# EAGLE board ToUPM (EAGLE 5.10)
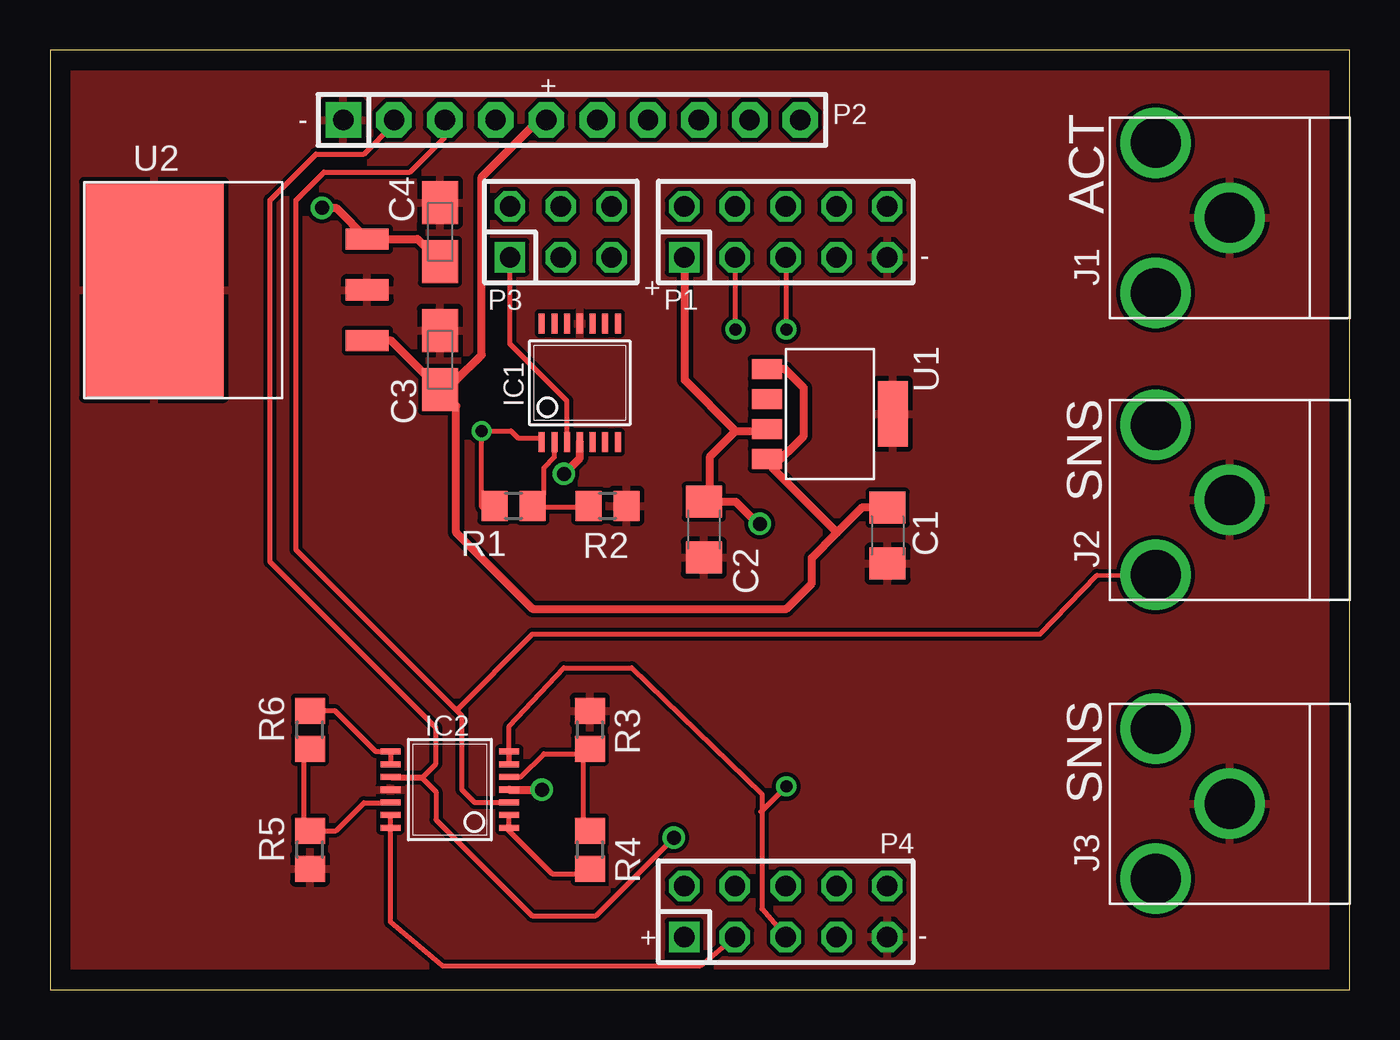
[diagram p0: board, top side]
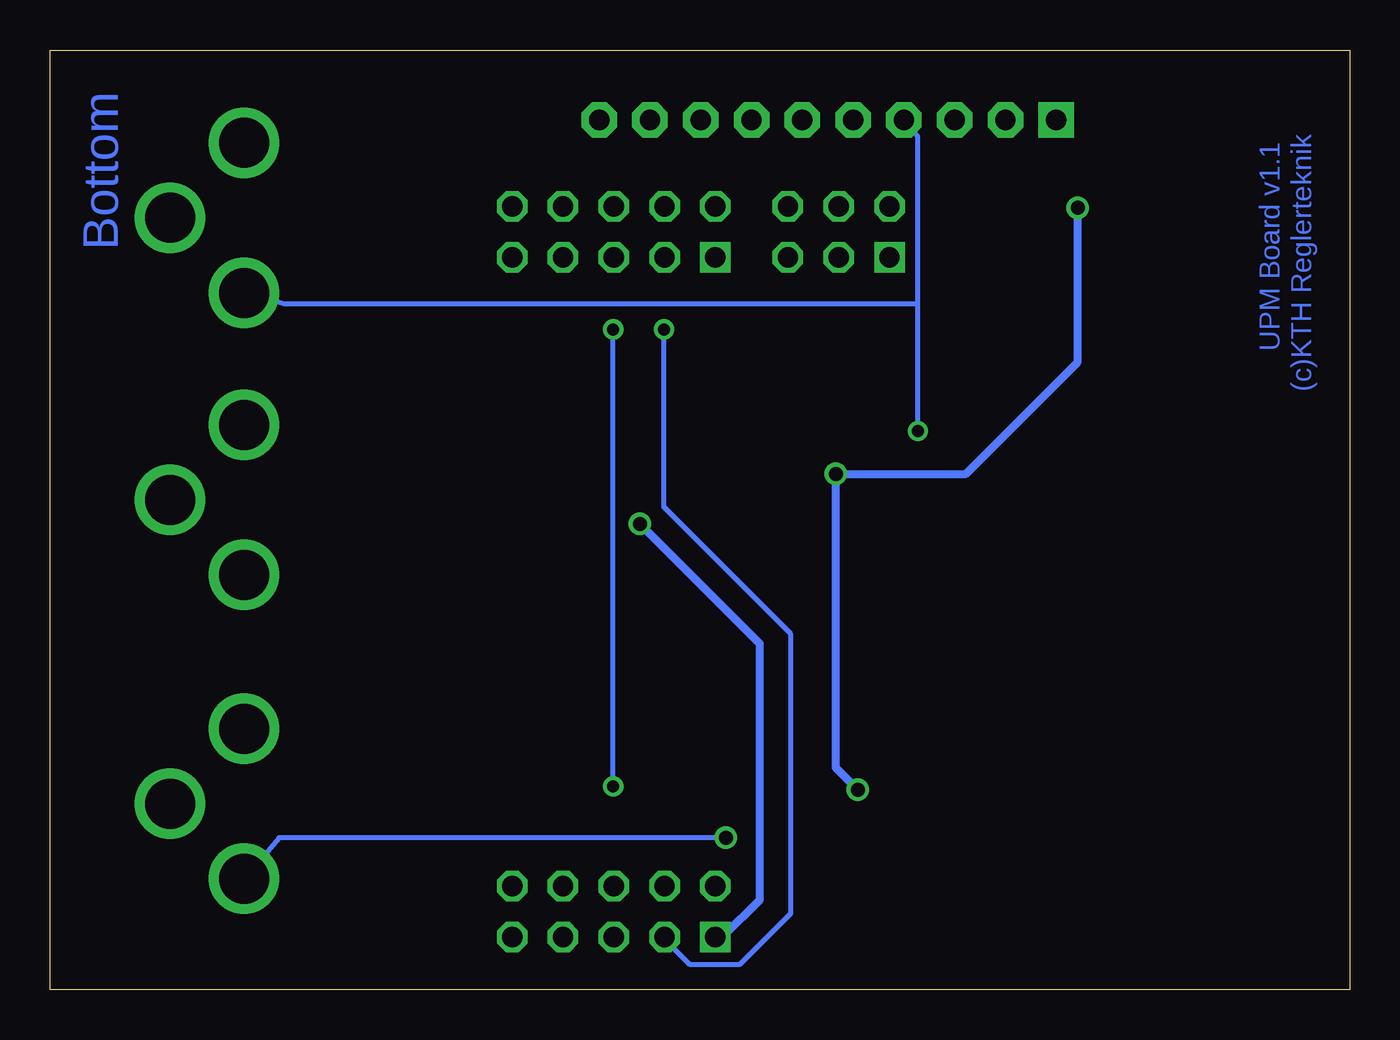
[diagram p1: board, bottom side, seen from below]

Size 65 x 47 mm. Coordinates in mm from the lower left corner, seen from the top.
Outline: 0,0 65,0 65,47 0,47 0,0
Copper layers (1*16): Top 0.035mm / dielectric 1.5mm / Bottom 0.035mm
Design rules "default *": minimum track width 10mil, minimum drill 24mil, track to track 8mil, track to pad 8mil, pad to pad 8mil, via to via 8mil, smd to smd 8mil, copper to edge 40mil, drill to drill 8mil, minimum pad ring 10mil, minimum via ring 8mil, stop-mask expansion 4mil, vias tented up to drill 0mil, thermal gap 10mil

## Footprints (pad centres in the part's own frame; a part is rotated, then mirrored left to right if it is on the bottom)
C3216 = smd 1.6 x 1.8: 1 -1.4,0; 2 1.4,0
A/3216-18W = smd 2.15 x 1.8: + 1.475,0; - -1.475,0
TSSOP14W = smd 0.305 x 0.991: 1 -1.905,-2.97; 2 -1.27,-2.97; 3 -0.635,-2.97; 4 0,-2.97; 5 0.635,-2.97; 6 1.27,-2.97; 7 1.905,-2.97; 8 1.905,2.97; 9 1.27,2.97; 10 0.635,2.97; 11 0,2.97; 12 -0.635,2.97; 13 -1.27,2.97; 14 -1.905,2.97
RCA = drill 2.5 round: 1 0,0; 2 -3.75,3.7; 3 3.75,3.7
DIL-100-2X05 = drill 1.016 square: 1 -5.08,-1.27 | drill 1.016 octagon: 2 -5.08,1.27; 3 -2.54,-1.27; 4 -2.54,1.27; 5 0,-1.27; 6 0,1.27; 7 2.54,-1.27; 8 2.54,1.27; 9 5.08,-1.27; 10 5.08,1.27
SIP-100-10-40 = drill 1.016 pad 1.778 square: 1 -11.43,0 | drill 1.016 pad 1.778 octagon: 2 -8.89,0; 3 -6.35,0; 4 -3.81,0; 5 -1.27,0; 6 1.27,0; 7 3.81,0; 8 6.35,0; 9 8.89,0; 10 11.43,0
DIL-100-2X03 = drill 1.016 square: 1 -2.54,-1.27 | drill 1.016 octagon: 2 -2.54,1.27; 3 0,-1.27; 4 0,1.27; 5 2.54,-1.27; 6 2.54,1.27
R0805 = smd 1.3 x 1.5: 1 -0.95,0; 2 0.95,0
SOT223-5 = smd 1 x 1.5: 1 -2.25,-3.15; 2 -0.75,-3.15; 3 0.75,-3.15; 4 2.25,-3.15 | smd 3.3 x 1.5: 5 0,3.15
TO263-3 = smd 1.067 x 2.159: 1 -2.54,-10.67; 2 0,-10.67; 3 2.54,-10.67 | smd 10.8 x 6.99: 4 0,0

## Placement (x,y rotation side)
C1  1u  [C3216]  41.89,22.71 270 top
C2  1u  [C3216]  32.71,23.01 270 top
C3  0.47u  [A/3216-18W]  19.5,31.5 270 top
C4  22u  [A/3216-18W]  19.5,37.9 270 top
IC1  LM324MT  [TSSOP14W]  26.5,30.35 0 top
IC2  LM324MT  [TSSOP14W]  20,10 90 top
J1  RCA  [RCA]  59,38.6 90 top
J2  RCA  [RCA]  59,24.5 90 top
J3  RCA  [RCA]  59,9.3 90 top
P1  M-2X05-DIL-100  [DIL-100-2X05]  36.8,37.9 0 top
P2  M-1X10-SIP-100-40  [SIP-100-10-40]  26.1,43.5 0 top
P3  M-2X03-DIL-100  [DIL-100-2X03]  25.55,37.9 0 top
P4  M-2X05-DIL-100  [DIL-100-2X05]  36.8,3.9 0 top
R1  2k  [R0805]  23.18,24.2 0 top
R2  10k  [R0805]  27.88,24.2 0 top
R3  1k  [R0805]  27,13 270 top
R4  2k  [R0805]  27,7 270 top
R5  1k  [R0805]  13,7 90 top
R6  2k  [R0805]  13,13 90 top
U1  LP38692MP  [SOT223-5]  39,28.8 270 top
U2  LM2940TO263  [TO263-3]  5.2,35 90 top

## Library data of the parts
C1-C4 R1-R6 = rcl
IC1 IC2 U1 = linear
J1-J3 P1-P4 = con-headers-jp
U2 = oli

## Nets
GND: C1.2 C2.2 C3.- C4.- IC1.11 IC2.11 J1.1 J2.1 J3.1 P1.9 P2.1 P4.9 R2.2 R3.1 R5.1 U1.5 U2.2 U2.4
N$1: IC2.1 IC2.2 R4.2
N$2: C4.+ IC1.4 IC2.4 U2.3
N$3: IC2.5 R3.2 R4.1
N$5: IC1.2 R1.2 R2.1
N$6: IC1.3 P3.1
N$7: C2.1 P1.1 P4.1 U1.3
N$8: IC2.3 J2.2 P2.3
N$9: IC2.10 J3.2 P2.2
N$10: IC2.8 IC2.9 R6.2
N$11: IC2.12 R5.2 R6.1
N$12: IC1.1 J1.2 P2.4 R1.1
N$13: IC2.6 IC2.7 P1.5 P4.5
N$14: IC2.13 IC2.14 P1.3 P4.3
VCC: C1.1 C3.+ P2.5 U1.1 U1.4 U2.1

## Tracks (layer width: path | path; a pad name or v marks a point on that pad's centre or on a via)
GND
  pour Top: 1,47 1,1 64,1 64,47
N$1
  Top 0.254: IC2.2 IC2.1 22.8,8.1 25.1,5.8 26.75,5.8 R4.2
N$2  (via drill 0.7)
  Top 0.406: C4.+ 18.39,37.54 U2.3 14.31,39.1 v13.6,39.1 | IC1.4 26.5,26.6 v25.7,25.8 | IC2.4 v24.6,10
  Bottom 0.406: v13.6,39.1 13.6,31.4 19.2,25.8 v25.7,25.8 25.7,11.1 v24.6,10
N$3
  Top 0.254: R4.1 26.67,7.62 26.67,11.43 26.76,11.6 | 26.76,11.6 R3.2 | IC2.5 23.54,10.63 24.7,11.8 26.57,11.8 26.76,11.6
N$5
  Top 0.254: R2.1 26.67,24.13 24.13,24.13 R1.2 24.7,24.77 24.7,26.1 25.23,26.63 IC1.2
N$6
  Top 0.254: P3.1 23.01,32.29 25.85,29.45 25.85,27.65 IC1.3
N$7  (via drill 0.7)
  Top 0.254: 35.56,27.94 U1.3 | C2.1 33.02,24.13 | 31.75,36.83 P1.1
  Top 0.406: 34.29,27.94 35.56,27.94 | 34.29,27.94 33.02,26.67 33.02,24.13 | 34.29,27.94 31.75,30.48 31.75,36.83 | v35.5,23.3 35.4,23.3 34.3,24.4 C2.1
  Bottom 0.406: P4.1 31.37,2.63 29.5,4.5 29.5,17.3 v35.5,23.3
N$8
  Top 0.254: P2.3 19.75,42.65 18,40.9 13.7,40.9 12.3,39.5 12.3,22 20.32,13.97 | 20.32,13.97 20.6,13.7 20.6,10 21.25,9.35 22.7,9.35 IC2.3 | 20.32,13.97 24.13,17.78 49.53,17.78 52.37,20.72 J2.2 | 20.32,13.97
N$9  (via drill 0.7)
  Top 0.254: P2.2 17.21,43.31 15.7,41.8 13.3,41.8 11,39.5 11,21.4 19.3,13.1 19.3,11.3 18.6,10.6 17.07,10.6 IC2.10 18.57,10.63 19.3,9.9 19.3,8.5 24.1,3.7 27.3,3.7 v31.2,7.6
  Bottom 0.254: v31.2,7.6 53.55,7.6 J3.2
N$10
  Top 0.254: IC2.9 IC2.8 17.28,11.9 16.3,11.9 14.25,13.95 R6.2
N$11
  Top 0.254: R6.1 12.7,11.43 12.7,7.62 R5.2 14.3,7.95 15.7,9.35 17.27,9.35 IC2.12
N$12  (via drill 0.61)
  Top 0.254: R1.1 21.59,24.13 v21.59,27.94 23.06,27.94 23.4,27.6 24.56,27.6 IC1.1
  Bottom 0.254: v21.59,27.94 21.59,34.29 | 21.59,34.29 21.59,42.68 P2.4 | 21.59,34.29 53.27,34.29 J1.2
N$13  (via drill 0.61)
  Top 0.254: IC2.7 IC2.6 22.97,13.17 25.7,16.1 29.1,16.1 35.6,9.8 35.6,8.89 | 35.6,8.89 35.6,4.03 P4.5 | v36.83,33.02 36.83,36.83 P1.5 | v36.83,10.16 35.56,8.89 35.6,8.89
  Bottom 0.254: v36.83,10.16 v36.83,33.02
N$14  (via drill 0.61)
  Top 0.254: IC2.13 IC2.14 17.03,3.37 19.6,1.2 32.53,1.2 P4.3 | v34.29,33.02 34.29,36.83 P1.3
  Bottom 0.254: v34.29,33.02 34.29,24.13 27.94,17.78 27.94,3.81 30.48,1.27 33.02,1.27 34.29,2.54 P4.3
VCC
  Top 0.254: 41.91,24.13 C1.1 | 20.32,30.48 C3.+ 20.32,29.21 | 36.12,26.11 35.56,26.67 U1.4
  Top 0.406: 39.37,22.86 38.1,21.59 38.1,20.32 36.83,19.05 24.13,19.05 20.32,22.86 20.32,29.21 | 39.37,22.86 40.64,24.13 41.91,24.13 | 20.32,30.48 21.59,31.75 21.59,40.64 24.13,43.18 P2.5 | U2.1 17.07,32.46 C3.+ | 39.37,22.86 36.12,26.11 37.7,27.7 37.7,30.1 36.75,31.05 U1.1

## Text on the board
Bottom: UPM Board v1.1 | Bottom | (c)KTH Reglerteknik
tNames: + | - | ACT | - | + | SNS | SNS | + | -